# EAGLE board cubesatsim-STEM-1.2 (EAGLE 7.5.0)
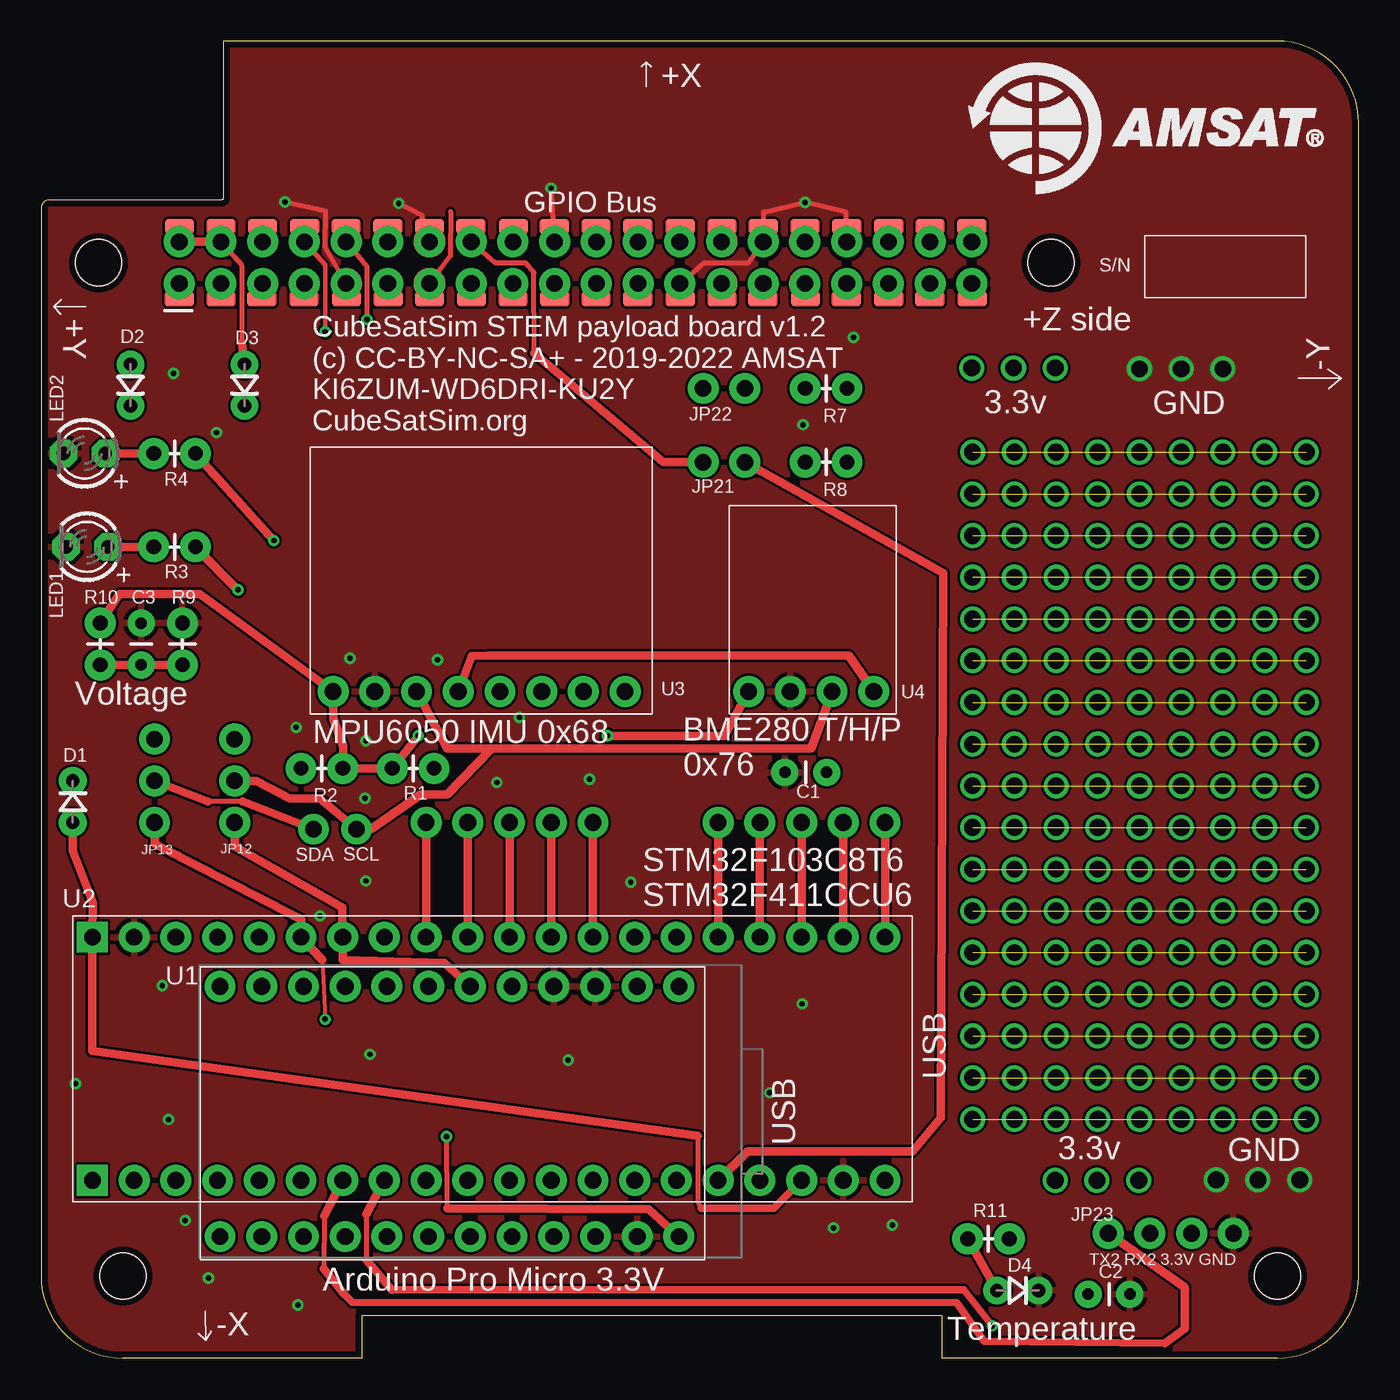
[diagram p0: board, top side]
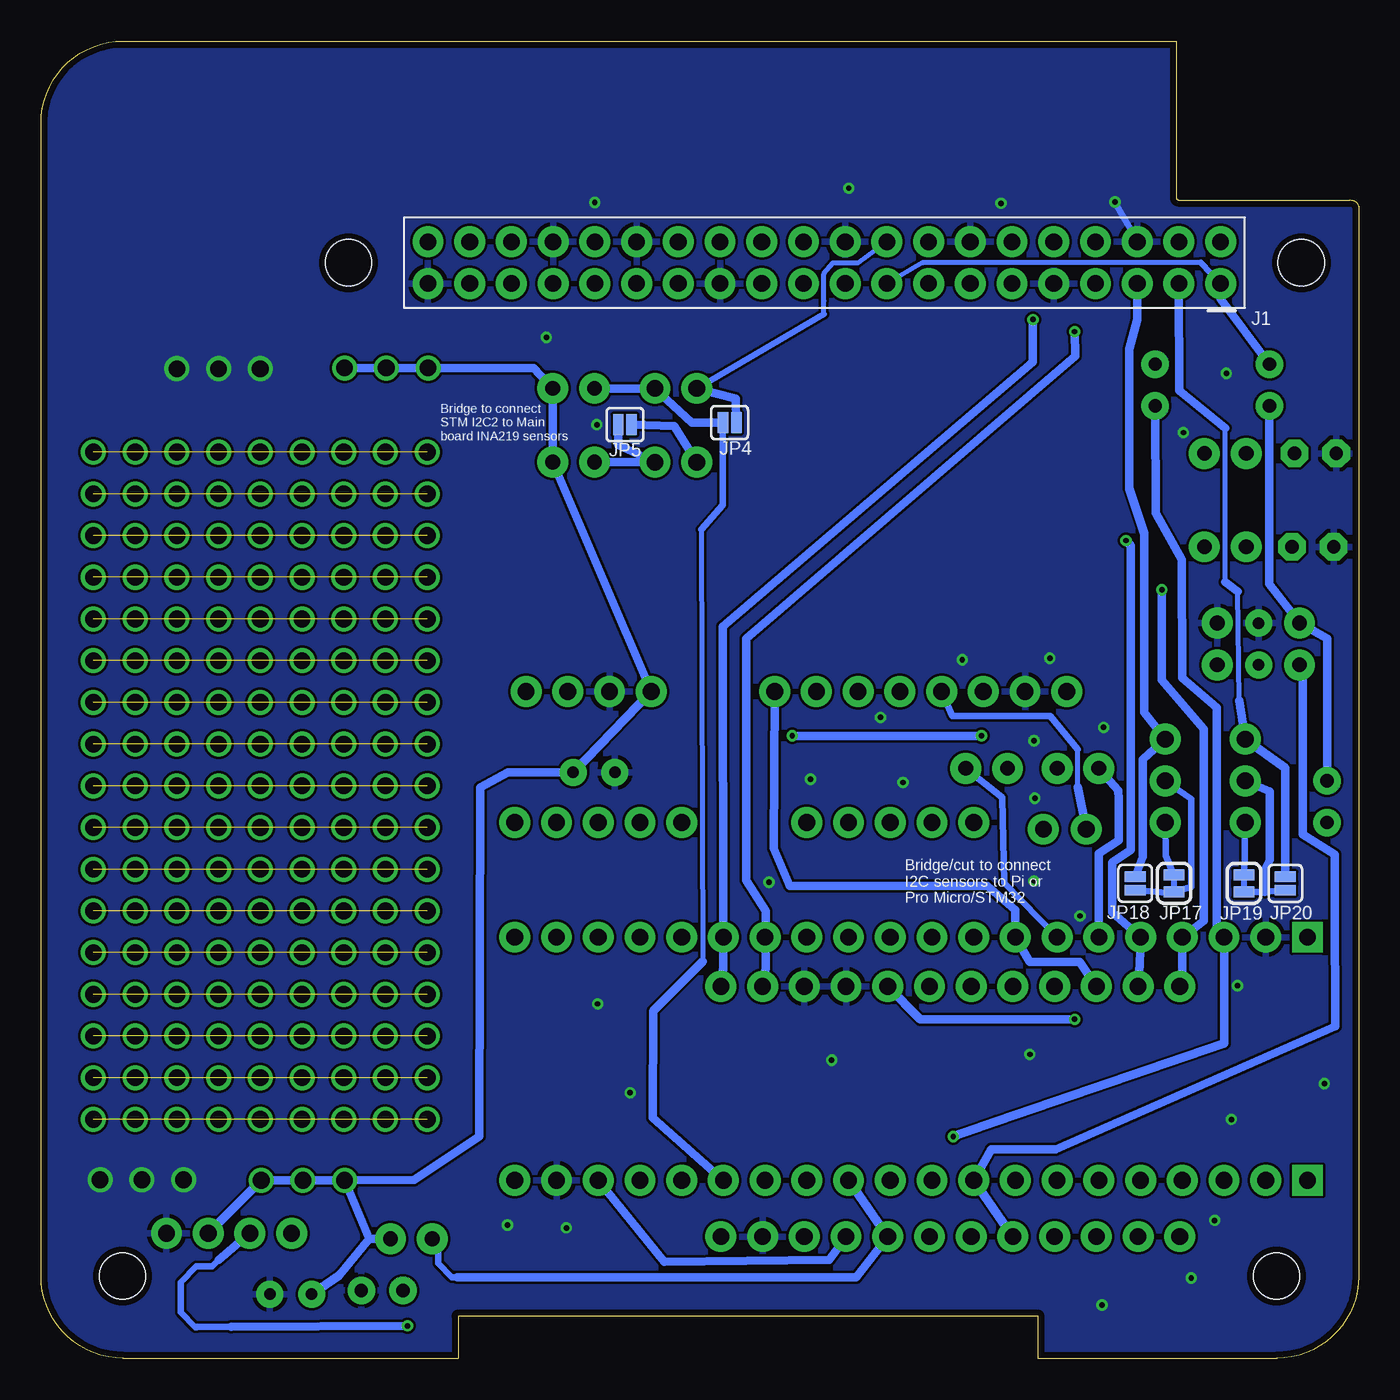
[diagram p1: board, bottom side, seen from below]

Size 80.23 x 80.24 mm. Coordinates in mm from the lower left corner, seen from the top.
Outline: 5,0.01 arc-90 0,5.01 0,70.08 arc-90 0.56,70.56 10.97,70.56 arc90 11.1,70.66 11.1,80.21 75.23,80.24 arc-90 80.23,75.24 80.23,5.01 arc-90 75.23,0.01
Outline: 4.97,0.03 19.53,0.03 19.53,2.59 54.84,2.59 54.84,0.03
Outline: 75.26,0 54.84,0
Copper layers (1*16): Top 0.0356mm / dielectric 1.5011mm / Bottom 0.0356mm
Design rules "LaenPCBOrder *": minimum track width 6mil, minimum drill 13mil, track to track 6mil, track to pad 6mil, pad to pad 6mil, via to via 6mil, smd to smd 6mil, copper to edge 15mil, drill to drill 6mil, minimum pad ring 7mil, minimum via ring 7mil, stop-mask expansion 3mil, vias tented up to drill 25mil, thermal gap 10mil
Net classes: 1 RF: clearance 0.381 mm
Holes 2.8 mm at 3.5,66.74 61.5,66.74 75.28,5.01 5,5.01

## Footprints (pad centres in the part's own frame; a part is rotated, then mirrored left to right if it is on the bottom)
CAP-PTH-SMALL = drill 0.7 pad 1.651: 1 0,0; 2 2.54,0
D-2.5 = drill 0.813 pad 1.676: A 1.27,0; C -1.27,0 | smd 1.676 x 1.676 bottom: P$1 -1.27,0; P$2 1.27,0
2X20 = drill 1.016 pad 1.88: 1 -24.13,-1.27; 2 -24.13,1.27; 3 -21.59,-1.27; 4 -21.59,1.27; 5 -19.05,-1.27; 6 -19.05,1.27; 7 -16.51,-1.27; 8 -16.51,1.27; 9 -13.97,-1.27; 10 -13.97,1.27; 11 -11.43,-1.27; 12 -11.43,1.27; 13 -8.89,-1.27; 14 -8.89,1.27; 15 -6.35,-1.27; 16 -6.35,1.27; 17 -3.81,-1.27; 18 -3.81,1.27; 19 -1.27,-1.27; 20 -1.27,1.27; 21 1.27,-1.27; 22 1.27,1.27; 23 3.81,-1.27; 24 3.81,1.27; 25 6.35,-1.27; 26 6.35,1.27; 27 8.89,-1.27; 28 8.89,1.27; 29 11.43,-1.27; 30 11.43,1.27; 31 13.97,-1.27; 32 13.97,1.27; 33 16.51,-1.27; 34 16.51,1.27; 35 19.05,-1.27; 36 19.05,1.27; 37 21.59,-1.27; 38 21.59,1.27; 39 24.13,-1.27; 40 24.13,1.27 | smd 1.778 x 0.914: P$1 -19.05,2.21; P$4 -16.485,2.21; P$10 -21.59,2.21; P$11 -24.117,2.223; P$12 -13.97,2.21; P$13 -11.43,2.21; P$14 -8.89,2.21; P$16 -6.375,2.21; P$17 -3.785,2.21; P$20 -1.295,2.21; P$21 1.245,2.21; P$22 3.785,2.21; P$23 6.375,2.21; P$27 8.915,2.21; P$28 11.43,2.21; P$29 13.97,2.21; P$30 16.51,2.21; P$31 19.075,2.21; P$32 21.59,2.21; P$33 24.13,2.21; P$41 -19.101,-2.21; P$44 -16.535,-2.21; P$50 -21.59,-2.21; P$51 -24.13,-2.21; P$52 -13.945,-2.21; P$53 -11.405,-2.21; P$54 -8.89,-2.21; P$56 -6.325,-2.21; P$57 -3.81,-2.21; P$60 -1.27,-2.21; P$61 1.245,-2.21; P$62 3.785,-2.21; P$63 6.375,-2.21; P$67 8.915,-2.21; P$68 11.405,-2.21; P$69 13.995,-2.21; P$70 16.485,-2.21; P$71 19.075,-2.21; P$72 21.565,-2.21; P$73 24.155,-2.21 | smd 1.905 x 1.905: P$3 -21.59,-1.27; P$5 -24.13,-1.27; P$6 -19.05,-1.27; P$7 -16.51,-1.27; P$8 -13.97,-1.27; P$9 -11.43,-1.27; P$15 -8.89,-1.27; P$18 -6.35,-1.27; P$19 -3.81,-1.27; P$24 -1.27,-1.27; P$25 1.27,-1.27; P$26 3.81,-1.27; P$34 6.35,-1.27; P$35 8.89,-1.27; P$36 11.43,-1.27; P$37 13.97,-1.27; P$38 16.51,-1.27; P$39 19.05,-1.27; P$40 21.59,-1.27; P$42 24.13,-1.27; P$43 -21.59,1.27; P$45 -24.13,1.27; P$46 -19.05,1.27; P$47 -16.51,1.27; P$48 -13.97,1.27; P$49 -11.43,1.27; P$55 -8.89,1.27; P$58 -6.35,1.27; P$59 -3.81,1.27; P$64 -1.27,1.27; P$65 1.27,1.27; P$66 3.81,1.27; P$74 6.35,1.27; P$75 8.89,1.27; P$76 11.43,1.27; P$77 13.97,1.27; P$78 16.51,1.27; P$79 19.05,1.27; P$80 21.59,1.27; P$81 24.13,1.27
1X01NS-KIT = drill 1.016 pad 1.88: 1 0,0
SMT-JUMPER_2_NO_SILK = smd 0.635 x 1.27: 1 -0.406,0; 2 0.406,0
1X03_NO_SILK = drill 1.016 pad 1.88: 1 0,0; 2 2.54,0; 3 5.08,0
SMT-JUMPER_2_NC_TRACE_SILK = smd 0.66 x 1.27: 1 -0.521,0; 2 0.521,0
1X02_NO_SILK = drill 1.016 pad 1.88: 1 0,0; 2 2.54,0
1X04_NO_SILK = drill 1.016 pad 1.88: 1 0,0; 2 2.54,0; 3 5.08,0; 4 7.62,0
LED3MM = drill 0.813 pad 1.676 octagon: A -1.27,0; K 1.27,0
AXIAL-0.1 = drill 0.9 pad 1.88: P$1 0,0; P$2 2.54,0
SPARKFUN_PRO_MICRO = drill 1.016 pad 1.88: 1 -7.62,12.7; 2 -7.62,10.16; 3 -7.62,7.62; 4 -7.62,5.08; 5 -7.62,2.54; 6 -7.62,0; 7 -7.62,-2.54; 8 -7.62,-5.08; 9 -7.62,-7.62; 10 -7.62,-10.16; 11 -7.62,-12.7; 12 -7.62,-15.24; 13 7.62,-15.24; 14 7.62,-12.7; 15 7.62,-10.16; 16 7.62,-7.62; 17 7.62,-5.08; 18 7.62,-2.54; 19 7.62,0; 20 7.62,2.54; 21 7.62,5.08; 22 7.62,7.62; 23 7.62,10.16; 24 7.62,12.7
1X20_NOSILK = drill 1.016 pad 1.88 square: 1 0,0 | drill 1.016 pad 1.88: 2 2.54,0; 3 5.08,0; 4 7.62,0; 5 10.16,0; 6 12.7,0; 7 15.24,0; 8 17.78,0; 9 20.32,0; 10 22.86,0; 11 25.4,0; 12 27.94,0; 13 30.48,0; 14 33.02,0; 15 35.56,0; 16 38.1,0; 17 40.64,0; 18 43.18,0; 19 45.72,0; 20 48.26,0
1X08_NO_SILK = drill 1.016 pad 1.88: 1 0,0; 2 2.54,0; 3 5.08,0; 4 7.62,0; 5 10.16,0; 6 12.7,0; 7 15.24,0; 8 17.78,0
1X04_NO_SILK_ALL_ROUND = drill 1.016 pad 1.88: 1 0,0; 2 2.54,0; 3 5.08,0; 4 7.62,0

## Placement (x,y rotation side)
C1  100nF  [CAP-PTH-SMALL]  47.83,35.69 180 top
C2  100nF  [CAP-PTH-SMALL]  63.75,3.92 0 top
C3  100nF  [CAP-PTH-SMALL]  6.1,42.24 90 top
D1  1N5817  [D-2.5]  1.93,33.91 270 top
D2  1N5817  [D-2.5]  5.44,59.29 90 top
D3  1N5817  [D-2.5]  12.4,59.29 90 top
D4  1N4148  [D-2.5]  59.46,4.14 180 top
J1  CONN_20X2  [2X20]  32.54,66.74 0 top
JP1  [1X01NS-KIT]  16.59,32.24 0 top
JP2  [1X01NS-KIT]  19.2,32.24 0 top
JP3  [1X01NS-KIT]  33.6,32.64 0 top
JP4  JUMPER-SMT_2_NO_SILK  [SMT-JUMPER_2_NO_SILK]  38.3,57 180 bottom
JP5  JUMPER-SMT_2_NO_SILK  [SMT-JUMPER_2_NO_SILK]  44.68,56.87 180 bottom
JP6  [1X01NS-KIT]  28.52,32.64 0 top
JP7  [1X01NS-KIT]  31.06,32.64 0 top
JP8  [1X01NS-KIT]  25.98,32.64 0 top
JP9  [1X01NS-KIT]  23.44,32.64 0 top
JP10  [1X01NS-KIT]  51.38,32.64 0 top
JP11  [1X01NS-KIT]  48.84,32.64 0 top
JP12  DNI-1x3 pin header with jumper  [1X03_NO_SILK]  11.79,32.64 90 top
JP13  DNI-1x3 pin header with jumper  [1X03_NO_SILK]  6.91,32.64 90 top
JP14  [1X01NS-KIT]  41.22,32.64 0 top
JP15  [1X01NS-KIT]  46.3,32.64 0 top
JP16  [1X01NS-KIT]  43.76,32.64 0 top
JP17  JUMPER-SMT_2_NC_TRACE_SILK  [SMT-JUMPER_2_NC_TRACE_SILK]  11.25,28.93 90 bottom
JP18  JUMPER-SMT_2_NO_SILK  [SMT-JUMPER_2_NO_SILK]  13.61,28.93 270 bottom
JP19  JUMPER-SMT_2_NC_TRACE_SILK  [SMT-JUMPER_2_NC_TRACE_SILK]  6.99,28.93 90 bottom
JP20  JUMPER-SMT_2_NO_SILK  [SMT-JUMPER_2_NO_SILK]  4.47,28.93 270 bottom
JP21  DNI-1x2 pin header  [1X02_NO_SILK]  42.85,54.59 180 top
JP22  DNI-1x2 pin header  [1X02_NO_SILK]  42.85,59.08 180 top
JP23  DNI-1x4 pin header  [1X04_NO_SILK]  72.59,7.62 180 top
LED1  Green 5mm  [LED3MM]  2.79,49.43 180 top
LED2  Blue 5mm  [LED3MM]  2.64,55.12 180 top
R1  4.7k  [AXIAL-0.1]  23.93,35.94 180 top
R2  4.7k  [AXIAL-0.1]  15.82,35.94 0 top
R3  1k  [AXIAL-0.1]  9.4,49.43 180 top
R4  100  [AXIAL-0.1]  9.4,55.12 180 top
R7  DNI-4k  [AXIAL-0.1]  49.07,59.08 180 top
R8  DNI-4k  [AXIAL-0.1]  49.07,54.59 180 top
R9  10K  [AXIAL-0.1]  8.61,42.24 90 top
R10  10K  [AXIAL-0.1]  3.61,44.78 270 top
R11  10K  [AXIAL-0.1]  56.41,7.29 0 top
U1  Sparkfun Pro Micro 3.3V 8MHz  [SPARKFUN_PRO_MICRO]  26.14,15.04 270 top
U2  1x20 female header  [1X20_NOSILK]  3.12,25.66 0 top
U2A  1x20 female header  [1X20_NOSILK]  3.12,10.85 0 top
U3  MPU6050  [1X08_NO_SILK]  35.56,40.62 180 top
U4  BME280  [1X04_NO_SILK_ALL_ROUND]  43.08,40.62 0 top

## Library data of the parts
C1-C3 = SparkFun-Capacitors
D1-D4 = diode
J1 = SparkFun-Connectors-AJ2
JP1-JP3 JP6-JP16 JP21 JP22 U2 U2A U4 = SparkFun-Connectors
JP4 JP5 JP17-JP20 = SparkFun-Jumpers
JP23 = SparkFun-Connectors; PROD_ID: CONN-09696
LED1 LED2 = adafruit
R1-R4 R7-R11 = SparkFun-Resistors
U1 = SparkFun-Boards
U3 = SparkFun-Connectors; PROD_ID: CONN-08438

## Nets
3.3V: C1.1 C2.1 D1.C D2.C JP23.2 R1.P$2 R2.P$2 R7.P$1 R8.P$1 R10.P$1 R11.P$2 U3.8 U4.1
5V: D3.C U1.24 U2.3
GND: C1.2 C2.2 C3.2 D4.C J1.6 J1.9 J1.14 J1.20 J1.25 J1.30 J1.34 J1.39 JP23.1 LED1.K LED2.K R9.P$2 U1.3 U1.4 U1.23 U2.2 U2A.19 U3.7 U4.2
IMU_ADC: U3.2
IMU_INT: U1.10 U2.8 U3.1
N$6: LED1.A R3.P$2
N$9: LED2.A R4.P$2
PA1: U2A.6
PA5: U2A.10
PA6: U2A.11
PA8: JP14.1 U2.16
PA11: JP3.1 U2.13
PA12: JP7.1 U2.12
PA15: JP6.1 U2.11
PB0: U2A.13
PB1: U2A.14
PB3: JP8.1 U2.10
PB4: JP9.1 U2.9
PB12: JP10.1 U2.20
PB13: JP11.1 U2.19
PB14: JP15.1 U2.18
PB15: JP16.1 U2.17
PC13: U2A.2
PC14: U2A.3
PC15: U2A.4
PI_3.3V: D2.A J1.1 J1.17
PI_5V: D3.A J1.2 J1.4
PI_LED1: J1.36
PI_LED2: J1.13
PI_RXD: J1.10 U1.1 U2.15
PI_SCL: J1.5 JP12.3 JP18.1
PI_SCL3: J1.18 JP4.1 JP22.2
PI_SDA: J1.3 JP13.3 JP20.1
PI_SDA3: J1.16 JP5.1 JP21.2
PI_TXD: J1.8 U1.2 U2.14
RX2: JP23.3 U2A.8
SCL: JP2.1 JP12.2 JP17.1 JP18.2 U3.6 U4.3
SDA: JP1.1 JP13.2 JP19.1 JP20.2 U3.5 U4.4
STM_3.3V: D1.A U1.21 U2.1 U2A.18
STM_LED1: R3.P$1 U1.12 U2.4
STM_LED2: R4.P$1 U1.11 U2.5
STM_SCL: JP12.1 JP17.2 R1.P$1 U1.6 U2.7
STM_SCL2: JP4.2 JP22.1 R7.P$2 U2A.15
STM_SDA: JP13.1 JP19.2 R2.P$1 U1.5 U2.6
STM_SDA2: JP5.2 JP21.1 R8.P$2 U2A.16
TEMPERATURE: D4.A R11.P$1 U1.20 U2A.12
TX2: JP23.4 U2A.7
VOLTAGE: C3.1 R9.P$1 R10.P$2 U1.17 U2A.9
XCL: U3.3
XDA: U3.4

## Tracks (layer width: path | path; a pad name or v marks a point on that pad's centre or on a via)
3.3V  (via drill 0.33, 1.02)
  Top 0.508: v34.49,37.93 41.6,37.93 U4.1 | v22.96,37.93 R1.P$2 R2.P$2 18.39,37.27 17.78,38.99 U3.8 9.65,46.56 4.78,46.56 R10.P$1
  Bottom 0.508: v61.75,10.85 v64.29,10.85 v66.83,10.85 JP23.2 | v61.75,60.33 v59.21,60.33 v56.67,60.33 50.24,60.33 R7.P$1 R8.P$1 U4.1 C1.1 51.82,35.69 53.49,34.78 53.54,13.54 57.51,10.87 v61.75,10.85 | R11.P$2 60.25,7.29 | D1.C 1.93,43.84 R10.P$1 5.44,47.17 D2.C | v22.96,37.93 v34.49,37.93 | 60.25,7.29 v61.75,10.85 | C2.1 62.08,5.06 60.25,7.29
5V  (via drill 0.33)
  Top 0.305: 24.74,9.15 v24.69,13.52
  Top 0.508: U1.24 37.01,9.1 24.74,9.15
  Bottom 0.508: v24.69,13.52 22.07,14.46 8.2,19.18 U2.3 8.64,25.96 8.66,39.65 10.74,41.46 10.77,48.64 12.37,51.49 D3.C
GND  (via drill 0.33, 1.02)
  Top 0.305: J1.9 17.3,67.69 17.32,69.88 v14.85,70.44 | J1.20 v31.05,71.28 | J1.14 23.19,69.62 v21.78,70.36 | J1.25 40.39,66.73 43.08,66.75 J1.30 43.99,69.83 v46.52,70.41 49.02,69.8 J1.34
  Bottom 0.406: J1.6 13.45,68.01 v14.85,70.44
  other vias: 66.88,60.28 69.42,60.28 71.96,60.28 71.55,10.88 74.09,10.88 76.63,10.88 19.77,29.09 19.77,37.62 8.06,60 33.39,35.28 29.12,39.04 19.72,34.12 16.98,26.95 15.53,38.43 27.75,35.08 18.81,42.65 24.14,42.55 20.03,18.52 32.09,18.16 15.63,3.25 48.25,7.95 8.77,8.41 7.76,14.56 7.38,22.71 46.34,21.59 35.9,29.01 10.2,4.91 51.83,8.13 44.36,16.18 2.09,16.74 49.47,62.18 10.68,56.39 46.39,56.87
  pour Bottom: 0,70.01 0,5.01 arc90 5,0.01 75.23,0.01 arc90 80.23,5.01 80.23,75.24 arc90 75.23,80.24 11.13,80.19 11.1,70.59 0.99,70.64 arc90
  pour Top: 0.03,69.98 0,5.01 arc90 5,0.01 75.23,0.01 arc90 80.23,5.01 80.23,75.24 arc90 75.23,80.24 11.1,80.19 11.13,70.59 1.22,70.64 arc90
IMU_INT
  Bottom 0.508: U3.1 35.61,31.06 34.65,28.78 22.61,28.78 20.93,27.31 U2.8 20.04,24.16 16.99,24.16 U1.10
N$4  (via drill 1.02)  (8 unrouted)
  other vias: 56.72,55.2 59.26,55.2 61.8,55.2 64.34,55.2 69.42,55.2 66.88,55.2 71.96,55.2 74.5,55.2 77.04,55.2
N$5  (via drill 1.02)  (8 unrouted)
  other vias: 56.72,52.66 59.26,52.66 61.8,52.66 64.34,52.66 69.42,52.66 66.88,52.66 71.96,52.66 74.5,52.66 77.04,52.66
N$6
  Top 0.508: LED1.A R3.P$2
N$7  (via drill 1.02)  (8 unrouted)
  other vias: 56.72,50.12 59.26,50.12 61.8,50.12 64.34,50.12 69.42,50.12 66.88,50.12 71.96,50.12 74.5,50.12 77.04,50.12
N$8  (via drill 1.02)  (8 unrouted)
  other vias: 56.72,47.58 59.26,47.58 61.8,47.58 64.34,47.58 69.42,47.58 66.88,47.58 71.96,47.58 74.5,47.58 77.04,47.58
N$9
  Top 0.508: LED2.A R4.P$2
N$10  (via drill 1.02)  (8 unrouted)
  other vias: 56.72,45.04 59.26,45.04 61.8,45.04 64.34,45.04 69.42,45.04 66.88,45.04 71.96,45.04 74.5,45.04 77.04,45.04
N$11  (via drill 1.02)  (8 unrouted)
  other vias: 56.72,42.5 59.26,42.5 61.8,42.5 64.34,42.5 69.42,42.5 66.88,42.5 71.96,42.5 74.5,42.5 77.04,42.5
N$12  (via drill 1.02)  (8 unrouted)
  other vias: 56.72,39.96 59.26,39.96 61.8,39.96 64.34,39.96 69.42,39.96 66.88,39.96 71.96,39.96 74.5,39.96 77.04,39.96
N$13  (via drill 1.02)  (8 unrouted)
  other vias: 56.72,37.42 59.26,37.42 61.8,37.42 64.34,37.42 69.42,37.42 66.88,37.42 71.96,37.42 74.5,37.42 77.04,37.42
N$14  (via drill 1.02)  (8 unrouted)
  other vias: 56.72,34.88 59.26,34.88 61.8,34.88 64.34,34.88 69.42,34.88 66.88,34.88 71.96,34.88 74.5,34.88 77.04,34.88
N$15  (via drill 1.02)  (8 unrouted)
  other vias: 56.72,32.34 59.26,32.34 61.8,32.34 64.34,32.34 69.42,32.34 66.88,32.34 71.96,32.34 74.5,32.34 77.04,32.34
N$16  (via drill 1.02)  (8 unrouted)
  other vias: 56.72,29.8 59.26,29.8 61.8,29.8 64.34,29.8 69.42,29.8 66.88,29.8 71.96,29.8 74.5,29.8 77.04,29.8
N$17  (via drill 1.02)  (8 unrouted)
  other vias: 56.72,27.26 59.26,27.26 61.8,27.26 64.34,27.26 69.42,27.26 66.88,27.26 71.96,27.26 74.5,27.26 77.04,27.26
N$18  (via drill 1.02)  (8 unrouted)
  other vias: 56.72,24.72 59.26,24.72 61.8,24.72 64.34,24.72 69.42,24.72 66.88,24.72 71.96,24.72 74.5,24.72 77.04,24.72
N$19  (via drill 1.02)  (8 unrouted)
  other vias: 56.72,22.18 59.26,22.18 61.8,22.18 64.34,22.18 69.42,22.18 66.88,22.18 71.96,22.18 74.5,22.18 77.04,22.18
N$20  (via drill 1.02)  (8 unrouted)
  other vias: 56.72,19.64 59.26,19.64 61.8,19.64 64.34,19.64 69.42,19.64 66.88,19.64 71.96,19.64 74.5,19.64 77.04,19.64
N$21  (via drill 1.02)  (8 unrouted)
  other vias: 56.72,17.1 59.26,17.1 61.8,17.1 64.34,17.1 69.42,17.1 66.88,17.1 71.96,17.1 74.5,17.1 77.04,17.1
N$22  (via drill 1.02)  (8 unrouted)
  other vias: 56.72,14.56 59.26,14.56 61.8,14.56 64.34,14.56 69.42,14.56 66.88,14.56 71.96,14.56 74.5,14.56 77.04,14.56
PA8
  Top 0.508: JP14.1 U2.16
PA11
  Top 0.508: JP3.1 U2.13
PA12
  Top 0.508: JP7.1 U2.12
PA15
  Top 0.508: JP6.1 U2.11
PB3
  Top 0.508: JP8.1 U2.10
PB4
  Top 0.508: JP9.1 U2.9
PB12
  Top 0.508: JP10.1 U2.20
PB13
  Top 0.508: JP11.1 U2.19
PB14
  Top 0.508: JP15.1 U2.18
PB15
  Top 0.508: JP16.1 U2.17
PI_3.3V
  Bottom 0.305: 9.63,66.75 26.57,66.73 J1.17
  Bottom 0.406: J1.1 9.63,66.75
  Bottom 0.508: D2.A 8.41,64.52 J1.1
PI_5V
  Top 0.305: J1.4 12.22,66.58 12.22,61.9
  Top 0.508: J1.2 J1.4 | 12.22,61.9 D3.A
PI_LED2
  Top 0.305: 24.94,69.85 24.92,67.16 J1.13
PI_RXD  (via drill 0.33)
  Top 0.305: J1.10 19.84,66.5 v19.84,63.27
  Bottom 0.508: v19.84,63.27 19.86,60.68 38.71,44.58 U2.15 38.68,23.65 38.71,23.68 U1.1
PI_SCL
  Bottom 0.406: JP12.3 11.81,37.72
  Bottom 0.508: J1.5 13.49,63.26 13.97,61.47 13.97,52.99 13.06,50.23 13.06,39.35 JP12.3 13.16,36.48 13.16,30.53 JP18.1
PI_SCL3
  Bottom 0.305: 32.59,63.61 32.56,64.42 32.56,66.07 32,66.73 30.48,66.73 J1.18
  Bottom 0.406: JP22.2 32.59,63.61
  Bottom 0.508: JP4.1 37.92,58.45 JP22.2
PI_SDA
  Bottom 0.305: 7.29,40.06 7.37,46.71 | 8.13,47.3 8.13,56.67
  Bottom 0.406: JP13.3 6.93,37.72
  Bottom 0.508: 6.93,37.72 4.47,35.97 JP20.1 | JP13.3 7.29,40.06 | 7.37,46.71 8.13,47.3 | 8.13,56.67 10.92,58.96 J1.3
PI_SDA3
  Top 0.305: J1.16 27.66,66.75 29.49,66.73 30,66.12 30.02,61.24
  Top 0.508: JP21.2 37.87,54.59 30.02,61.24
  Bottom 0.508: JP5.1 41.68,56.77 JP21.2
PI_TXD  (via drill 0.33)
  Top 0.279: 17.3,66.6 v17.3,62.54
  Top 0.305: J1.8 17.3,66.6
  Bottom 0.508: v17.3,62.54 17.27,61.04 37.29,43.84 37.29,29.11 36.12,27.26 U2.14 36.12,23.78 36.22,23.02 U1.2
RX2  (via drill 0.33)
  Top 0.305: 19.79,8.79 19.79,6.02
  Top 0.457: 21.36,4.17 56.19,4.19 v57.91,1.98
  Top 0.508: U2A.8 19.79,8.79 | 19.79,6.02 21.36,4.17
  Bottom 0.406: 68.66,1.93 70.71,1.93 70.74,1.91 70.84,1.91 71.73,2.8 71.73,4.65 70.76,5.62 69.8,5.62 69.42,6
  Bottom 0.508: v57.91,1.98 68.66,1.93 | 69.42,6 JP23.3
SCL
  Top 0.508: U4.3 46.89,37.16 27.43,37.16 | 27.43,37.16 24.74,37.16 U3.6 | JP12.2 13.11,35.18 15.14,34.12 16.97,34.12 JP2.1 20.09,32.24 23.11,34.34 24.74,34.34 27.43,37.16
  Bottom 0.406: 11.81,35.18 JP12.2 10.19,34.09 10.21,31.17 10.19,28.71 JP17.1 11.66,28.35 JP18.2
SDA
  Top 0.305: 12.29,33.91 10.16,33.91
  Top 0.508: U4.4 49.17,42.8 27.23,42.8 26.21,42.78 U3.5 | JP13.2 10.16,33.91 | 12.29,33.91 JP1.1
  Bottom 0.305: 17.09,34.8 17.09,37.09
  Bottom 0.406: 17.09,37.09 18.8,39.12 24.77,39.12 U3.5 | JP20.2 5.71,28.42 JP19.1
  Bottom 0.508: JP1.1 17.09,34.8 | JP13.2 5.41,34.55 5.41,30.36 5.71,29.72 5.71,28.42
STM_3.3V
  Top 0.305: 39.98,13.57 39.98,9.55 40.21,9.15
  Top 0.457: 40.21,9.15 44.6,9.15 U2A.18
  Top 0.508: 39.98,13.57 3.12,18.72 U2.1 3.15,27.77 1.93,30.92 D1.A
  Bottom 0.508: U2A.18 42.29,5.9 32.23,6 U1.21
STM_LED1  (via drill 0.33)
  Top 0.508: R3.P$1 v11.99,46.82
  Bottom 0.508: v11.99,46.82 11.99,41.33 9.45,38.33 9.42,26.65 U2.4 10.74,23.5 10.97,22.58 U1.12
STM_LED2  (via drill 0.33)
  Top 0.508: R4.P$1 v14.17,49.81
  Bottom 0.508: v14.17,49.81 13.87,49.51 13.89,30.97 15.01,30.2 15.01,27.16 U2.5 13.34,24.03 U1.11
STM_SCL
  Top 0.508: JP12.1 11.79,31.17 18.34,27.46 U2.7 18.36,24.29 24.56,24.08 U1.6
  Bottom 0.406: R1.P$1 21.72,34.17 21.59,28.96 U2.7 | 11.81,32.64 JP12.1 11.76,30.64 JP17.2
STM_SCL2
  Bottom 0.305: 40.03,50.47 39.95,24.18 | 42.95,21.16 42.95,21.31
  Bottom 0.406: 40.03,50.47 38.71,51.97 JP4.2
  Bottom 0.508: R7.P$2 JP22.1 40.62,57 JP4.2 | U2A.15 42.98,14.66 42.95,21.16 39.95,24.18
STM_SDA  (via drill 0.33)
  Top 0.254: 17.12,24.26 v17.3,20.65
  Top 0.508: JP13.1 6.93,31.32 15.85,26.75 U2.6 17.12,24.26
  Bottom 0.406: JP13.1 JP19.2
  Bottom 0.508: v17.3,20.65 26.7,20.65 U1.5 | R2.P$1 14.63,34.6 14.61,34.06 14.61,31.55 15.83,30.75 U2.6
STM_SDA2
  Top 0.508: JP21.1 54.91,47.83 54.76,14.66 53.09,12.6 43.03,12.6 U2A.16
  Bottom 0.508: R8.P$2 JP21.1 45.09,55.63 JP5.2
TEMPERATURE
  Top 0.508: R11.P$1 D4.A
  Bottom 0.406: 54.89,4.96 55.22,4.96 56.06,5.79 56.06,6.94 R11.P$1
  Bottom 0.508: U2A.12 U1.20 30.58,4.96 54.89,4.96
TX2
  Top 0.305: 17.25,8.69 17.22,5.46
  Top 0.457: 68.43,0.92 57.43,1.04 55.75,3.38 18.95,3.41 18.46,3.9
  Top 0.508: U2A.7 17.25,8.69 | 17.22,5.46 18.46,3.9 | 68.43,0.92 69.65,1.81 69.62,4.35 JP23.4
VOLTAGE
  Top 0.508: R10.P$2 C3.1 R9.P$1
  Bottom 0.508: R10.P$2 3.4,42.32 3.4,31.91 1.45,30.69 1.47,27.66 1.42,20.22 18.44,12.73 22.38,12.73 U2A.9 U1.17

## Text on the board
tPlace: +X | GPIO Bus | S/N | +Y | +Z side | -Y | 3.3v | GND | CubeSatSim STEM payload board v1.2 / (c) CC-BY-NC-SA+ - 2019-2022 AMSAT / KI6ZUM-WD6DRI-KU2Y / CubeSatSim.org | Voltage | MPU6050 IMU 0x68 | BME280 T/H/P / 0x76 | SDA | SCL | STM32F103C8T6 / STM32F411CCU6 | USB | USB | 3.3v | GND | TX2 RX2 3.3V GND | Arduino Pro Micro 3.3V | -X | Temperature
bPlace: Bridge to connect / STM I2C2 to Main / board INA219 sensors | Bridge/cut to connect / I2C sensors to Pi or / Pro Micro/STM32
tValues: I2C2 Jumpers | Pi | I2C1 Jumpers